# Altium PCB EL-23 PCB.PcbDoc
Units mil, origin at the board's own origin, x right, y up, seen from the top; angles counter-clockwise.
Board outline 1614.17 x 1122.05 mil, 2 copper layers (Top Layer, Bottom Layer); 7 components, 11 nets, 31 pads, 28 vias.
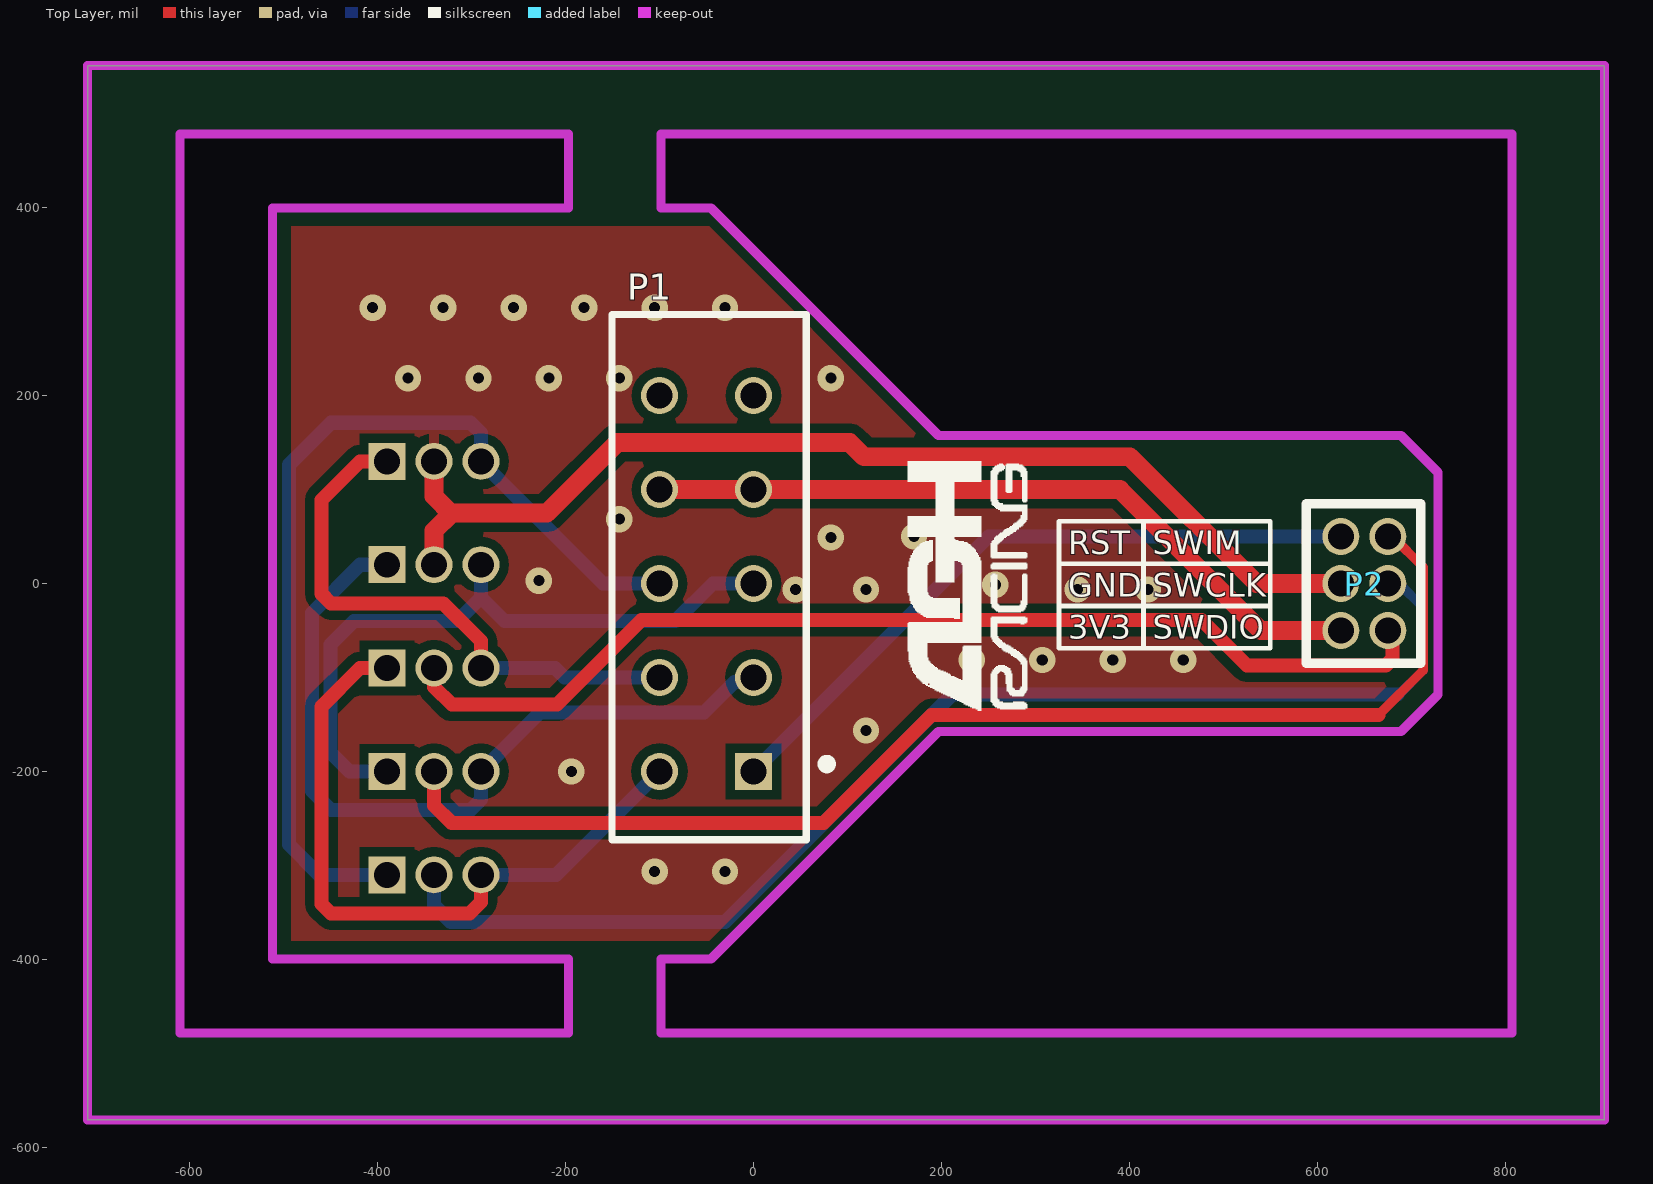
[diagram p0: Top Layer view]
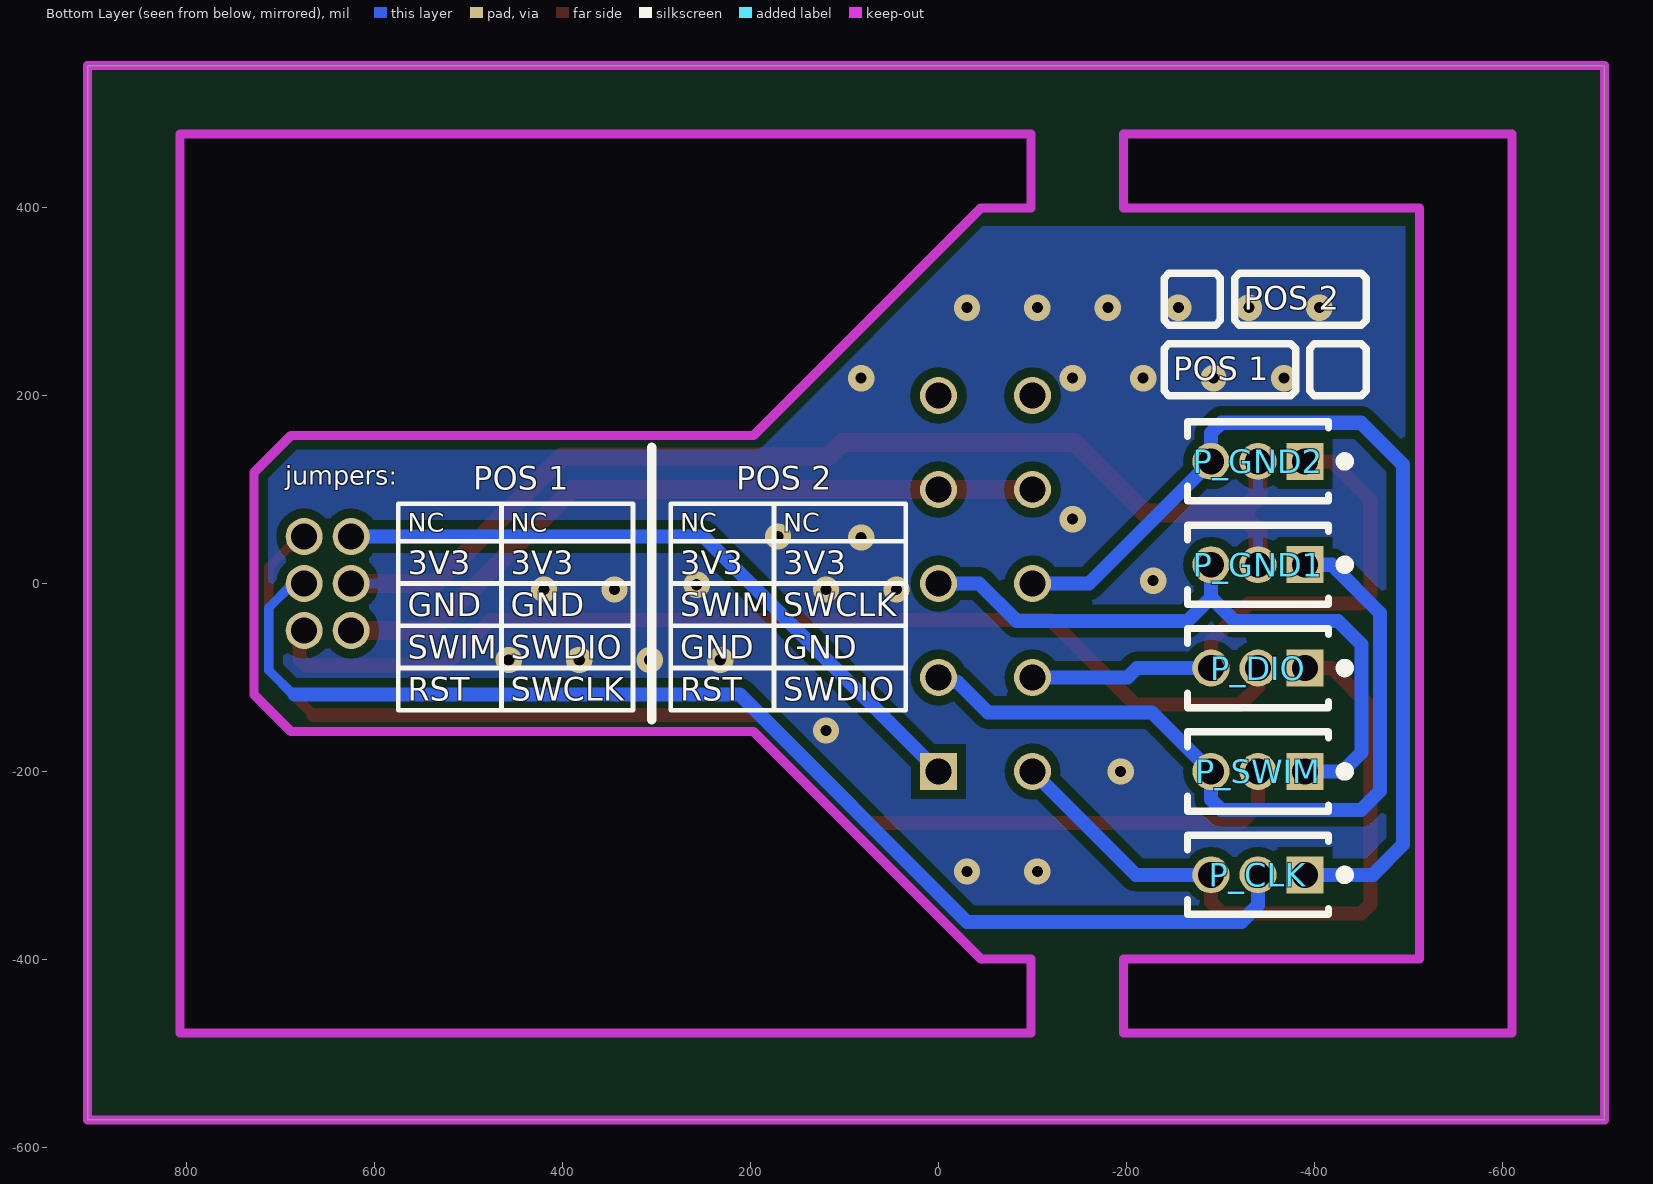
[diagram p1: Bottom Layer view, seen from below]
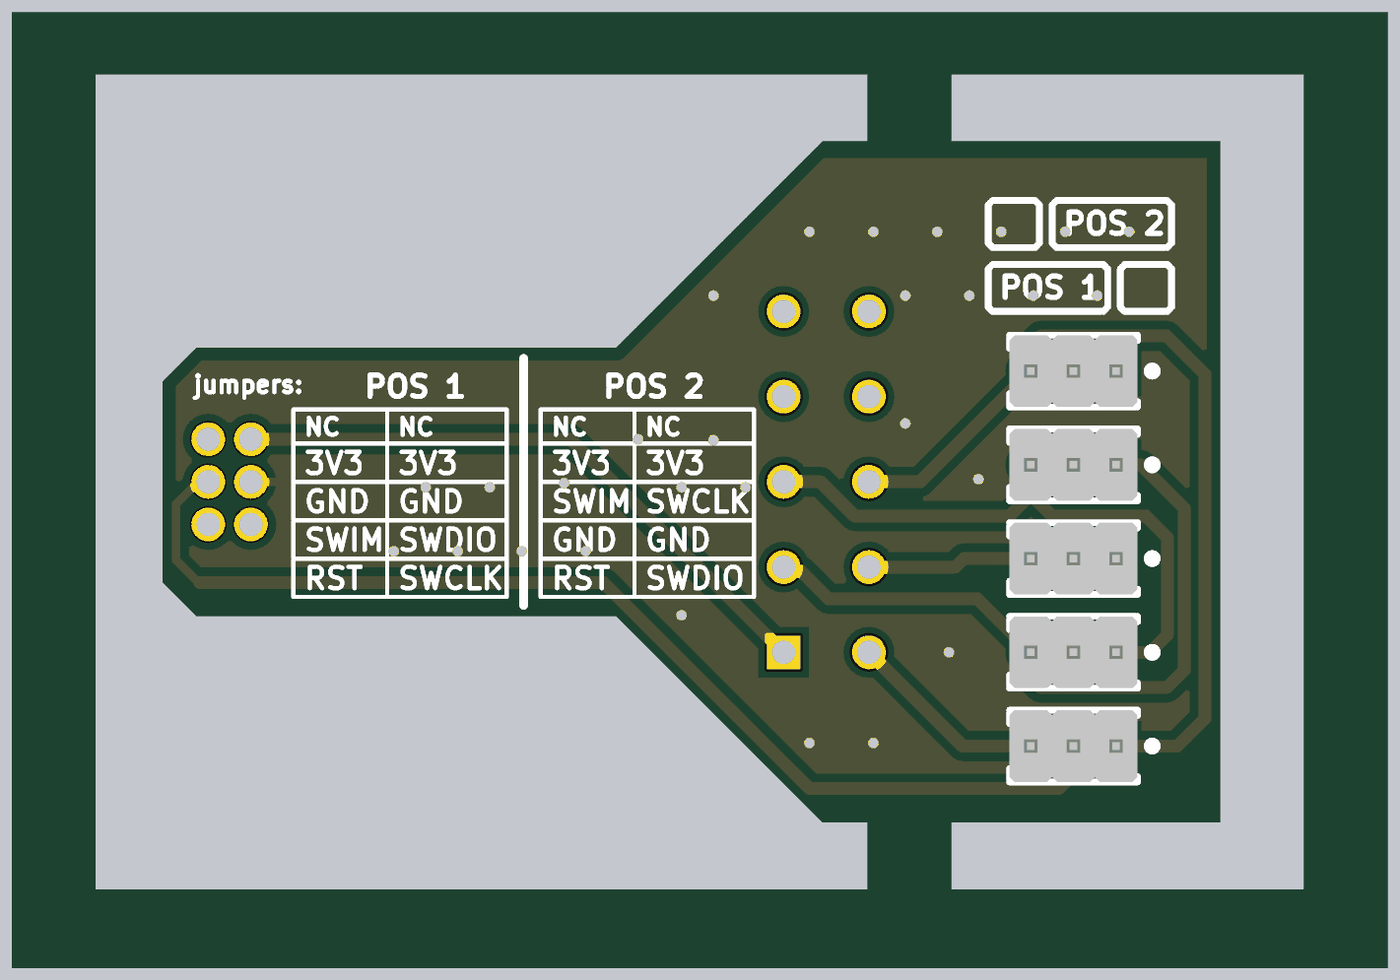
[diagram p2: 3D render of the assembled board from below, using the file's embedded part models]

## Layer stack, top to bottom
Top Solder: solder mask 0.4, Solder Resist, Dk 3.5
Top Layer: signal copper 1.4
Dielectric 1: dielectric 12.6, FR-4, Dk 4.8
Bottom Layer: signal copper 1.4
Bottom Solder: solder mask 0.4, Solder Resist, Dk 3.5

## Board outline
-708.66,-570.87 -708.66,551.18 905.51,551.18 905.51,-570.87
cut-out: -98.43,-399.61 -45.28,-399.61 -39.37,-393.7 196.85,-157.48 688.98,-157.48 728.35,-118.11 728.35,118.11 688.98,157.48 196.85,157.48 -39.37,393.7 -45.28,399.61 -98.43,399.61 -98.43,478.35 807.09,478.35 807.09,-478.35 -98.43,-478.35
cut-out: -610.24,-478.35 -610.24,478.35 -196.85,478.35 -196.85,399.61 -511.81,399.61 -511.81,-399.61 -196.85,-399.61 -196.85,-478.35

## Design rules (kind name [scope] priority, off if disabled: settings)
Clearance [All] p1: gap=10 ignorepadtopadclearanceinfootprint=FALSE except(0: Arc-Hole Track-Hole SMDPad-Hole THPad-Hole Via-Hole Fill-Hole Poly-Hole Region-Hole Text-Hole; 5: Arc-Arc Arc-Track Arc-SMDPad Track-Track Track-SMDPad SMDPad-SMDPad)
ComponentClearance ComponentClearance_1 [IsNetTieComponent] p1: gap=0 collisioncheckmode=3 verticalgap=0 showdistances=FALSE
ComponentClearance [All] p2: gap=10 collisioncheckmode=3 verticalgap=10 showdistances=FALSE
HoleToHoleClearance [All] p1: gap=7 allowstackedmicrovias=TRUE
MinimumSolderMaskSliver [All] p1: minsoldermaskwidth=6
PasteMaskExpansion [All] p1: expansion=3
PolygonConnect PolygonConnect_Via [IsVia] p1: connectstyle=Direct reliefconductorwidth=10 reliefentries=4 polygonreliefangle="90 Angle" airgapwidth=10
PolygonConnect PolygonConnect_MH [HasFootprint('MOUNTING HOLE 2mm') or HasFootprint('MOUNTING HOLE 3mm')] p2: connectstyle=Direct reliefconductorwidth=10 reliefentries=4 polygonreliefangle="90 Angle" airgapwidth=10
PolygonConnect [All] p3: connectstyle=Relief reliefconductorwidth=10 reliefentries=4 polygonreliefangle="90 Angle" airgapwidth=10
RoutingVias [All] p1: holewidth=28 width=50 viastyle="Through Hole" minholewidth=28 minwidth=50 maxholewidth=28 maxwidth=50 useviatemplates=TRUE viatemplateguid#1={307AFF8D-70FF-48B8-A99E-4FD5DD3BA6DC} viatemplateguid#2={7C821D88-889A-4419-B1F3-04276608E0DD} viatemplateguid#3={6377EA1F-44E8-48D8-A7A8-A1AF887AFA51} viatemplateguid#4={D31630F9-C733-4265-A758-78AC21B22467} viatemplatename#1=v71h30m0mx0 viatemplatename#2=v71h30m71 viatemplatename#3=v102h50m0mx0 viatemplatename#4=v127h70
SilkToSilkClearance [All] p1: silktosilkclearance=4
SilkToSolderMaskClearance [IsPad] p1: minsilkscreentomaskgap=7 clearancetoexposedcopper=TRUE
SolderMaskExpansion [All] p1: expansion=3
Width Width_POWER [InNetClass('POWER')] p1: maxlimit=30 minlimit=8 preferedwidth=15
Width [Not InNetClass('POWER')] p2: maxlimit=20 minlimit=8 preferedwidth=10
24 further rules are at their usual default settings.

## Components (designator, comment, footprint, x,y, rotation, side; value= is the part's Value field where it differs from the comment)
P1 "Header 10" SHDRV10W102P254_2X5_2032X895X915P 0,-200 r90 top locked
P2 "Header 6" HEADER_2x3_1_17_WOMAN_THT 675,-50 r90 top
P_CLK "Header 3" "HEADER 1x3 1.27mm" -340,-310 r0 bottom
P_DIO "Header 3" "HEADER 1x3 1.27mm" -340,-90 r0 bottom
P_GND1 "Header 3" "HEADER 1x3 1.27mm" -340,20 r0 bottom
P_GND2 "Header 3" "HEADER 1x3 1.27mm" -340,130 r0 bottom
P_SWIM "Header 3" "HEADER 1x3 1.27mm" -340,-200 r0 bottom

## Footprints (in the part's own frame and the unit in brackets; to place one, negate y for a bottom-side part, rotate by r counter-clockwise, add the part's x,y. Pads: shape width x height; smd on the part's side, far side on the other; paste and mask are expansions set on the pad)
"HEADER 1x3 1.27mm" [mm] "Header, 3-Leads, Body 3.81x2.14mm, Pitch 1.27mm"
  rect 1x1 hole 0.7 mask+0.051: 1(-1.27,0)
  round 1 hole 0.7 mask+0.051: 2(0,0) 3(1.27,0)
  silkscreen extent -2.47,-1.07 1.91,1.07, body extent -1.9,-1.07 1.91,1.07, height 4
HEADER_2x3_1_17_WOMAN_THT [mm]
  round 1 hole 0.7 mask+0.051: 1(0,0) 2(0,1.27) 3(1.27,0) 4(1.27,1.27) 5(2.54,0) 6(2.54,1.27)
  silkscreen extent -0.89,-0.89 3.43,2.2, body extent -1.53,-4.95 3.13,1.4, height 5.6
SHDRV10W102P254_2X5_2032X895X915P [mm]
  rect 1x1 hole 0.7: 1(0,0)
  round 1 hole 0.7: 2(0,2.54) 3(2.54,0) 4(2.54,2.54) 5(5.08,0) 6(5.08,2.54) 7(7.62,0) 8(7.62,2.54) 9(10.16,0) 10(10.16,2.54)
  silkscreen extent -1.85,-2.1 12.35,3.83, body extent -5,-1.43 15.15,13.3, height 12.1

## Part data
P1: "Header, 10-Pin"
P2: "Header, 6-Pin"
P_CLK P_DIO P_GND1 P_GND2 P_SWIM: "Header, 3-Pin"

## Via types
v1: diameter 28, hole 11.81, Top Layer to Bottom Layer, tented both sides, 28 vias

## Nets (pads, with @x,y where several pads share a name; then routed paths per layer and width w, separated by ;. In a path a pad name is that pad's centre, name@x,y a point inside that pad or via, vN(x,y) a via of type N, cw(c..) or ccw(c..) an arc to the next point about the centre after c; other vN are vias at no path point)
3V3: P1.7 P1.8 P2.2 | length 792.1
  Top Layer w20: P1.8 P1.7 390,100 540,-50 P2.2@629.92,-50
GND: P2.4 P_GND1.2 P_GND2.2 | length 1170
  Top Layer w20: P_GND1.2 -340,56.06 -321.6,74.46 -340,92.87 P_GND2.2 ; -321.6,75 -220,75 -145,150 102.5,150 117.5,135 400.37,135 535.37,0 P2.4@629.92,0
  other v1: -105.24,-306.46 -30.24,-306.46 -193.87,-200 119.76,-156.46 232.26,-81.46 307.26,-81.46 382.26,-81.46 457.26,-81.46 44.76,-6.46 119.76,-6.46 344.76,-6.46 419.76,-6.46 257.39,-1.36 -228.45,3.11 82.26,48.92 170.78,50 -142.74,68.54 -367.74,218.54 -292.74,218.54 -217.74,218.54 -142.74,218.54 82.26,218.54 -405.24,293.54 -330.24,293.54 -255.24,293.54 -180.24,293.54 -105.24,293.54 -30.24,293.54
PIN2: P1.2 P_CLK.3 P_DIO.1 | length 740.2
  Top Layer w15: P_DIO.1 -418.74,-90 -459.86,-131.12 -459.86,-340.87 -449.61,-351.12 -302.38,-351.12 -290,-338.74 P_CLK.3
  Bottom Layer w15: P_CLK.3 -210,-310 P1.2
PIN3: P1.3 P_GND1.1 P_SWIM.3 | length 845.2
  Bottom Layer w15: P_GND1.1 -418.74,20 -470,-31.26 -470,-220.73 -449.61,-241.12 -301.12,-241.12 -290,-230 P_SWIM.3 -227.19,-137.19 -52.59,-137.19 -20.07,-104.66 -4.66,-104.66 P1.3
PIN4: P1.4 P_DIO.3 P_GND2.1 | length 600.3
  Top Layer w15: P_GND2.1 -418.74,130 -459.86,88.88 -459.86,-10.87 -449.61,-21.12 -330.14,-21.12 -290,-61.26 P_DIO.3
  Bottom Layer w15: P_DIO.3 -211.26,-90 -201.26,-100 P1.4
PIN5: P1.5 P_GND1.3 P_SWIM.1 | length 715.9
  Bottom Layer w15: P_SWIM.1 -430,-200 -450,-180 -450,-65 -425,-40 -315,-40 -290,-15 ; P_GND1.3 -290,-15 ; P1.5 -43.3,0 -83.3,-40 -265,-40 -290,-15
PIN6: P1.6 P_CLK.1 P_GND2.3 | length 1023.2
  Bottom Layer w15: P_CLK.1 -462.13,-310 -494.31,-277.82 -494.31,126.42 -449.61,171.12 -301.12,171.12 -290,160 P_GND2.3 -160,0 P1.6
RST: P1.1 P2.6 | length 733.5
  Bottom Layer w15: P1.1 250,50 P2.6@629.92,50
SWCLK: P2.3 P_CLK.2 | length 1312.4
  Bottom Layer w10: P2.3@679.92,0 686.8,0 712.64,-25.83 712.64,-92.36 685.94,-119.06
  Bottom Layer w15: P_CLK.2 -340,-342.13 -322.13,-360 -30.42,-360 211.47,-118.11 685,-118.11
SWDIO: P2.1 P_DIO.2 | length 1138
  Top Layer w15: P_DIO.2 -340,-109.95 -321.03,-128.92 -209.18,-128.92 -119.22,-38.96 476.71,-38.96 524.93,-87.19 672.83,-87.19 679.92,-80.1 P2.1@679.92,-50
SWIM: P2.5 P_SWIM.2 | length 1319.8
  Top Layer w10: 665.02,-139.98 712.64,-92.36 712.64,17.28 P2.5@679.92,50
  Top Layer w15: P_SWIM.2 -340,-236.06 -321.06,-255 74.58,-255 189.6,-139.98 665.02,-139.98
pads on no net: P1.9 P1.10

## Polygon pours and split planes (outlines as drawn)
GND on Bottom Layer "GND_poly_Bottom" (solid, remove dead copper, pour order 3): -511.81,380 -511.81,-380 -25.67,-380 196.85,-157.48 688.98,-157.48 728.35,-118.11 728.35,118.11 688.98,157.48 196.85,157.48 -25.67,380
GND on Top Layer "GND_poly_Top" (solid, remove dead copper, pour order 5): -492.13,-380 -25.67,-380 196.85,-157.48 688.98,-157.48 728.35,-118.11 728.35,118.11 688.98,157.48 196.85,157.48 -25.67,380 -492.13,380

## Keep-outs
Keep-Out Layer:
  pour cut-out: -610.24,-478.35 -610.24,478.35 -196.85,478.35 -196.85,399.61 -511.81,399.61 -511.81,-399.61 -196.85,-399.61 -196.85,-478.35
  pour cut-out: -196.85,-478.35 -196.85,-399.61 -511.81,-399.61 -511.81,399.61 -196.85,399.61 -196.85,478.35 -610.24,478.35 -610.24,-478.35
  lines w10: -708.66,-570.87 -708.66,551.18 905.51,551.18 905.51,-570.87 -708.66,-570.87 ; -610.24,-478.35 -610.24,478.35 -196.85,478.35 -196.85,399.61 -511.81,399.61 -511.81,-399.61 -196.85,-399.61 -196.85,-478.35 -610.24,-478.35 ; -98.43,-478.35 -98.43,-399.61 -59.06,-399.61 -45.28,-399.61 -39.37,-393.7 196.85,-157.48 688.98,-157.48 728.35,-118.11 728.35,118.11 688.98,157.48 196.85,157.48 -39.37,393.7 -45.28,399.61 -98.43,399.61 -98.43,478.35 807.09,478.35 807.09,-478.35 -98.43,-478.35

## Other copper
Top Layer:
  region net 3V3: 629.92,-50

## Silkscreen, mask and mechanical layers (free items; w line width, h text height)
Top Overlay:
  drawing of 14 lines, arcs and shapes, not listed
  text "RST" at 335,31.16 h25
  text "SWIM" at 425,31.16 h25
  text "GND" at 335,-13.84 h25
  text "SWCLK" at 425,-13.84 h25
  text "3V3" at 335,-58.84 h25
  text "SWDIO" at 425,-58.84 h25
Bottom Overlay:
  lines w5: 35,-90 285,-90 ; 35,-45 285,-45 ; 35,0 285,0 ; 35,45 285,45 ; 175,-135 175,85 ; 325,-90 575,-90 ; 325,-45 575,-45 ; 325,0 575,0 ; 325,45 575,45 ; 465,-135 465,85 ; 35,-135 285,-135 285,85 35,85 35,-135 ; 325,-135 325,85 575,85 575,-135 325,-135
  lines w8: -455,205 -455,250 -450,255 -400,255 -395,250 -395,205 -400,200 -450,200 -455,205 ; -455,280 -450,275 -320,275 -315,280 -315,325 -320,330 -450,330 -455,325 -455,280 ; -380,205 -380,250 -375,255 -245,255 -240,250 -240,205 -245,200 -375,200 -380,205 ; -300,280 -295,275 -245,275 -240,280 -240,325 -245,330 -295,330 -300,325 -300,280
  lines w10: 305,-145 305,145
  text "POS 2" at -325,291.25 h25
  text "POS 1" at -250,216.25 h25
  text "jumpers:" at 695,105 h20
  text "POS 2" at 215,100 h25
  text "POS 1" at 495,100 h25
  text "NC" at 165,55 h20
  text "NC" at 275,55 h20
  text "NC" at 455,55 h20
  text "NC" at 565,55 h20
  text "3V3" at 165,10 h25
  text "3V3" at 275,10 h25
  text "3V3" at 455,10 h25
  text "3V3" at 565,10 h25
  text "SWCLK" at 165,-35 h25
  text "SWIM" at 275,-35 h25
  text "GND" at 455,-35 h25
  text "GND" at 565,-35 h25
  text "GND" at 165,-80 h25
  text "GND" at 275,-80 h25
  text "SWDIO" at 455,-80 h25
  text "SWIM" at 565,-80 h25
  text "SWDIO" at 165,-125 h25
  text "RST" at 275,-125 h25
  text "SWCLK" at 455,-125 h25
  text "RST" at 565,-125 h25